# Altium PCB Posedge_LogiX1_MegaWing.PcbDoc
Units mil, origin at the board's own origin, x right, y up, seen from the top; angles counter-clockwise.
Board outline 3350.14 x 2700 mil, 2 copper layers (Top Layer, Bottom Layer); 73 components, 88 nets, 300 pads, 18 vias.
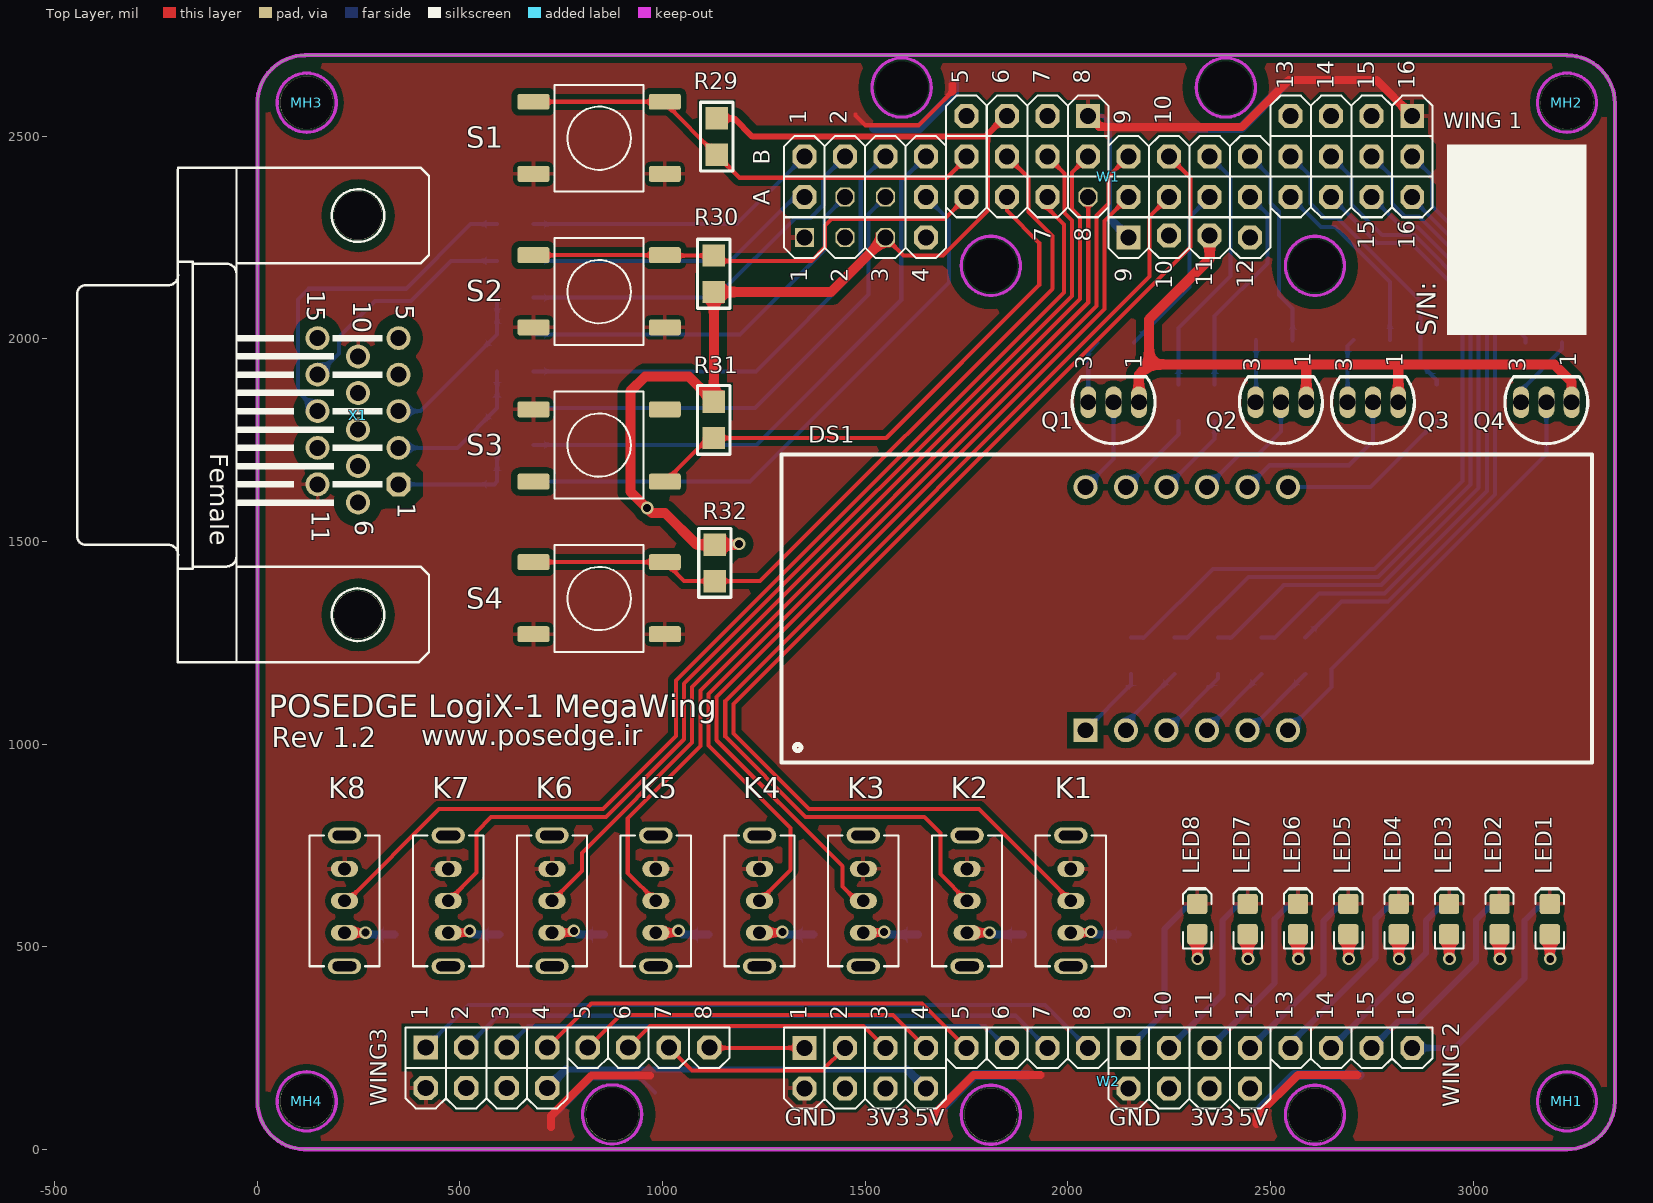
[diagram p0: Top Layer view]
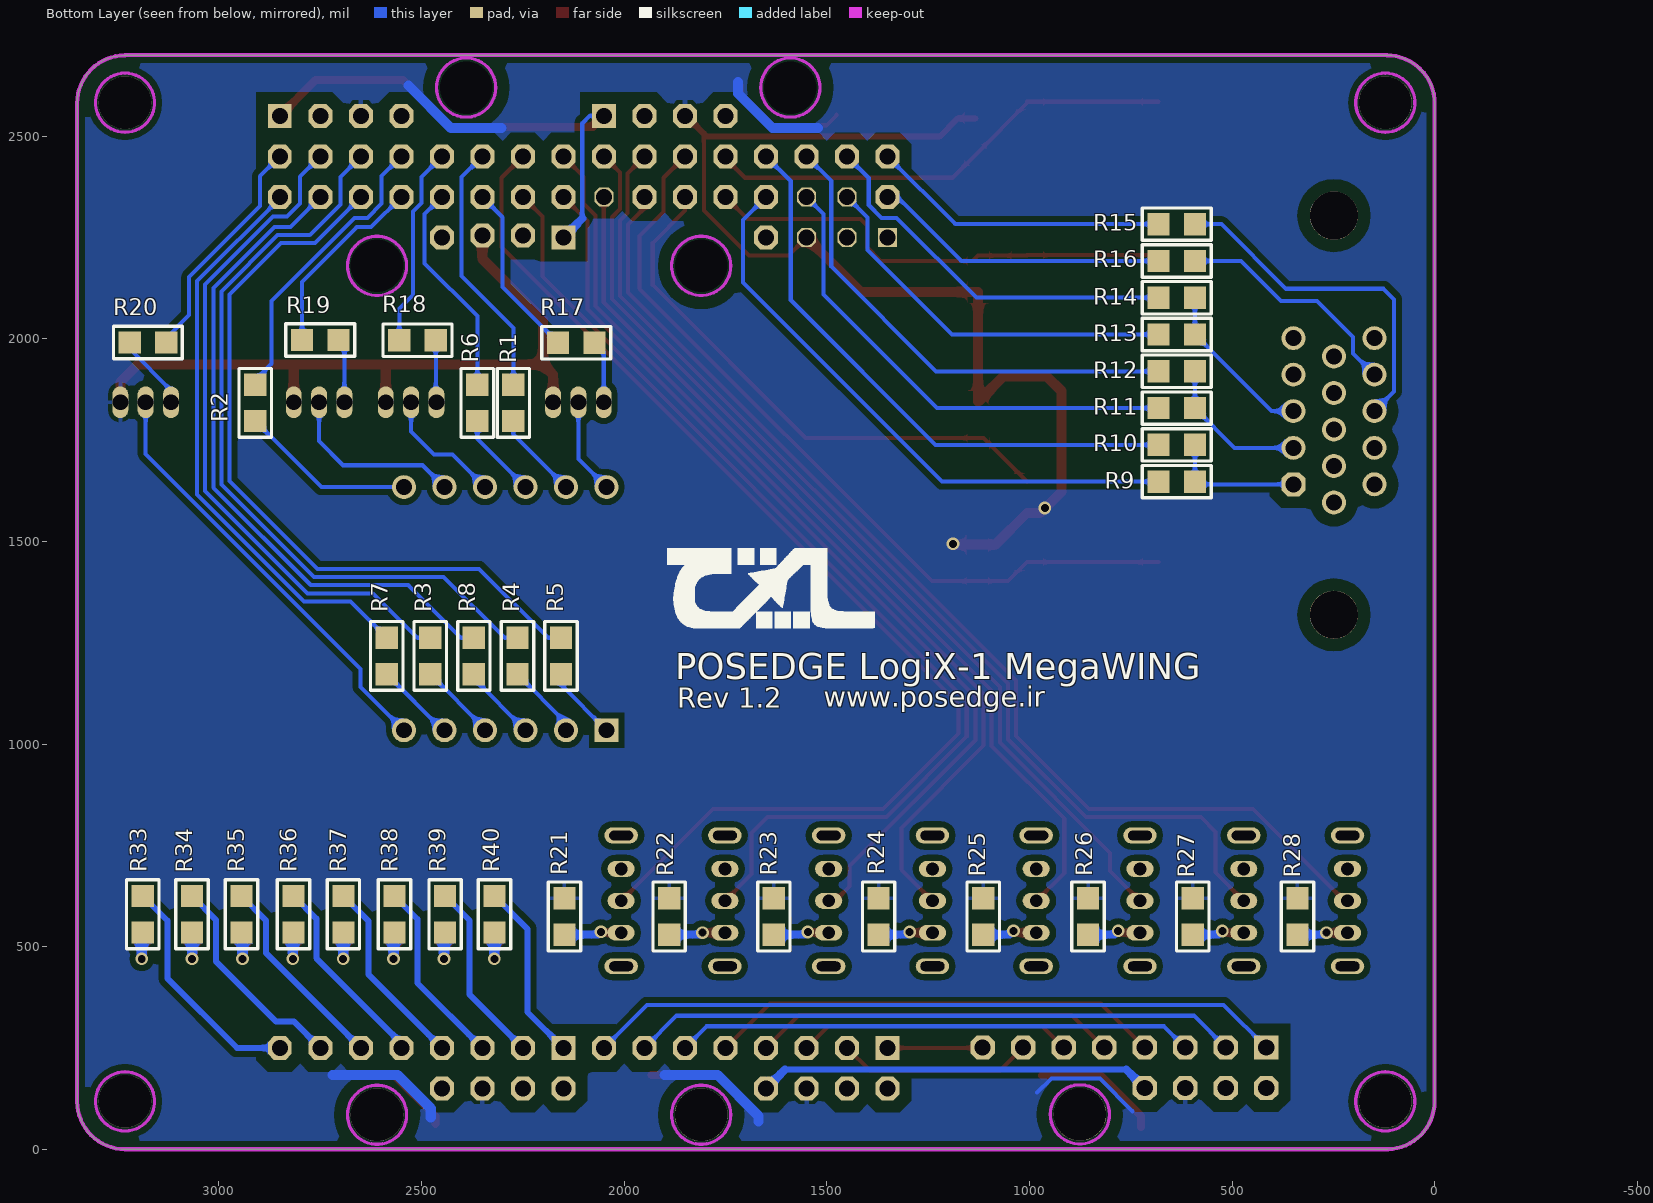
[diagram p1: Bottom Layer view, seen from below]

## Layer stack, top to bottom
Top Solder: solder mask 2, Solder Resist, Dk 3.5
Top Layer: signal copper 1.4
Dielectric 1: dielectric 12.6, FR-4, Dk 4.8
Bottom Layer: signal copper 1.4
Bottom Solder: solder mask 0.4, Solder Resist, Dk 3.5

## Board outline
0,117.5 ccw(c118.11,118.08) 115.17,0 3231.86,0 ccw(c3231.89,118.11) 3350,117.65 3350,2581.5 ccw(c3231.89,2581.54) 3232.35,2699.64 3232.35,2700 118,2700 118,2699.65 ccw(c117.97,2581.54) -0.14,2582 0,2582

## Design rules (kind name [scope] priority, off if disabled: settings)
Clearance Clearance_CH_GND [InNet('CHGND') vs OnLayer('Keep-Out Layer')] p1 off: gap=0
Clearance Clearance_Poly_to_con [InNet('GND','VCC3V3') and InPoly vs InComponent('P*','J*','W*','X*')] p2: gap=30
Clearance Clearance_poly_to_power [InNet('GND','VCC3V3') and InPoly vs (InNet('VCC1V2') OR InNet('VCC3V3') OR InNet('VCC5V0') OR InNet('USB_VCC') OR InNet('VCC5V0_EXT') OR InNet('VCC5V0_USB') OR InNet('VCC5V0_EXT#'))] p3: gap=20
Clearance Clearance_poly_to_all [InNet('GND','VCC3V3') and InPoly] p4: gap=15
Clearance Clearance_poly3_poly5 [InNet('VCC3V3') and InPoly vs InNet('VCC5V0')] p5: gap=15
Clearance Clearance_all_to_all [All] p6: gap=6
DiffPairsRouting [All] p1: maxlimit=10 minlimit=10 mostfreqgap=10 toplayer_minwidth=10 toplayer_maxwidth=15 toplayer_prefwidth=15 bottomlayer_minwidth=10 bottomlayer_maxwidth=15 bottomlayer_prefwidth=15 maxuncoupledlength=500
HoleSize [All] p1: absolutevalues=TRUE maxlimit=150 minlimit=1 maxpercent=80.000 minpercent=20.000
MinimumSolderMaskSliver [All] p1: minsoldermaskwidth=1
PolygonConnect PolygonConnect_via [IsVia] p1: connectstyle=Direct reliefconductorwidth=10 reliefentries=4 polygonreliefangle="90 Angle" airgapwidth=10
PolygonConnect PolygonConnect_GND [InNet('GND')] p2: connectstyle=Relief reliefconductorwidth=10 reliefentries=4 polygonreliefangle="90 Angle" airgapwidth=10
PolygonConnect PolygonConnect_VCC3V3 [InNet('VCC3V3')] p3: connectstyle=Relief reliefconductorwidth=10 reliefentries=4 polygonreliefangle="90 Angle" airgapwidth=10
RoomDefinition wing [InComponentClass('wing')] p1: confinementstyle=ConfineIn formatcopy=TRUE lockcomponents=FALSE outline -3880.5,-2677 -1880.5,-2677 -1880.5,-1677 -3880.5,-1677
RoomDefinition Sheet1 [InComponentClass('Sheet1')] p2: confinementstyle=ConfineIn formatcopy=TRUE lockcomponents=FALSE outline -3880.5,-2677 -1880.5,-2677 -1880.5,-1677 -3880.5,-1677
RoutingCorners RoutingCorners_1 [OnLayer('Top Overlay')] p1: cornerstyle=90-Degree minsetback=100 maxsetback=100
RoutingCorners [All] p2: cornerstyle=45-Degree minsetback=100 maxsetback=100
RoutingVias [All] p1: holewidth=19.68 width=31.5 viastyle="Through Hole" minholewidth=11.81 minwidth=19.68 maxholewidth=31.5 maxwidth=47.24
SilkToBoardRegionClearance [All] p1 off:
SilkToSilkClearance [All] p1: silktosilkclearance=1
SilkToSolderMaskClearance [IsPad] p1: minsilkscreentomaskgap=2 clearancetoexposedcopper=TRUE
SolderMaskExpansion [All] p1: expansion=4
ViasUnderSMD [All] p1: allowed=FALSE
Width [All] p1: maxlimit=75 minlimit=10 preferedwidth=10 minimp=50.000000 maximp=50.000000 favimp=50.000000
23 further rules are at their usual default settings.

## Classes and differential pairs
component class wing: MH1 MH2 MH3 MH4 W1 W2
net class WING1: SEG_A SEG_AN1 SEG_AN2 SEG_AN3 SEG_AN4 SEG_B SEG_C SEG_D SEG_DP SEG_E SEG_F SEG_G SW1 SW2 SW3 SW4 VGA_BLUE0 VGA_BLUE1 VGA_GREEN0 VGA_GREEN1 VGA_HS VGA_RED0 VGA_RED1 VGA_VS W1_A7 W1_A8 W1_A9 W1_A10 W1_B7 W1_B8 W1_B9 W1_B10
net class WING2: LED0 LED1 LED2 LED3 LED4 LED5 LED6 LED7 W2_A1 W2_A2 W2_A3 W2_A4 W2_A5 W2_A6 W2_A7 W2_A8
component class Sheet1: DS1 K1 K2 K3 K4 K5 K6 K7 K8 LED1 LED2 LED3 LED4 LED5 LED6 LED7 LED8 Q1 Q2 Q3 Q4 R1 R2 R3 R4 R5 R6 R7 R8 R9 R10 R11 R12 R13 R14 R15 R16 R17 R18 R19 R20 R21 R22 R23 R24 R25 R26 R27 R28 R29 R30 R31 R32 R33 R34 R35 R36 R37 R38 R39 R40 S1 S2 S3 S4 Wing3 X1

## Components (designator, comment, footprint, x,y, rotation, side; value= is the part's Value field where it differs from the comment)
DS1 "4 digit multiplexed 7_segment display" 7SEG-MPX4-CA 2293.5,1334 r0 top
K1 "ON-ON" SWITCH_SLIDER 2007.5,613 r90 top
K2 "ON-ON" SWITCH_SLIDER 1751.43,613 r90 top
K3 "ON-ON" SWITCH_SLIDER 1495.36,613 r90 top
K4 "ON-ON" SWITCH_SLIDER 1239.29,613 r90 top
K5 "ON-ON" SWITCH_SLIDER 983.21,613 r90 top
K6 "ON-ON" SWITCH_SLIDER 727.14,613 r90 top
K7 "ON-ON" SWITCH_SLIDER 471.07,613 r90 top
K8 "ON-ON" SWITCH_SLIDER 215,613 r90 top
LED1 "" LED_0805 3189.6,568 r90 top
LED2 "" LED_0805 3065.3,568 r90 top
LED3 "" LED_0805 2941,568 r90 top
LED4 "" LED_0805 2816.7,568 r90 top
LED5 "" LED_0805 2692.4,568 r90 top
LED6 "" LED_0805 2568.1,568 r90 top
LED7 "" LED_0805 2443.8,568 r90 top
LED8 "" LED_0805 2319.5,568 r90 top
MH1 "MOUNTING HOLE" MOUNTING_HOLE 3231.89,118.11 r90 top locked
MH2 "MOUNTING HOLE" MOUNTING_HOLE 3231.89,2582.68 r90 top locked
MH3 "MOUNTING HOLE" MOUNTING_HOLE 121.65,2582.68 r90 top
MH4 "MOUNTING HOLE" MOUNTING_HOLE 121.65,118.11 r90 top locked
Q1 "A733" TO-92 2113,1843.5 r90 top
Q2 "A733" TO-92 2526,1843.5 r90 top
Q3 "A733" TO-92 2753,1843.5 r90 top
Q4 "A733" TO-92 3181,1843.5 r90 top
R1 "100R" R0805_M 2273.5,1842 r270 bottom
R2 "100R" R0805_M 2910.5,1842 r270 bottom
R3 "100R" R0805_M 2478.5,1217.5 r270 bottom
R4 "100R" R0805_M 2263.5,1217.5 r270 bottom
R5 "100R" R0805_M 2156,1217.5 r270 bottom
R6 "100R" R0805_M 2362.5,1842 r270 bottom
R7 "100R" R0805_M 2586,1217.5 r270 bottom
R8 "100R" R0805_M 2371,1217.5 r270 bottom
R9 "510R" R0805_M 636.5,1647.5 r0 bottom
R10 "1.2K" R0805_M 636.5,1738.29 r0 bottom
R11 "510R" R0805_M 636.5,1829.07 r0 bottom
R12 "1.2K" R0805_M 636.5,1919.86 r0 bottom
R13 "510R" R0805_M 636.5,2010.64 r0 bottom
R14 "1.2K" R0805_M 636.5,2101.43 r0 bottom
R15 "100R" R0805_M 636.5,2283 r0 bottom
R16 "100R" R0805_M 636.5,2192.21 r0 bottom
R17 "1.2K" R0805_M 2118.5,1990.5 r0 bottom
R18 "1.2K" R0805_M 2510,1996.5 r0 bottom
R19 "1.2K" R0805_M 2750,1997 r0 bottom
R20 "1.2K" R0805_M 3175.5,1991 r180 bottom
R21 "4.7K" R0805_M 2147.5,574.5 r270 bottom
R22 "4.7K" R0805_M 1889.07,574.5 r270 bottom
R23 "4.7K" R0805_M 1630.64,574.5 r270 bottom
R24 "4.7K" R0805_M 1372.21,574.5 r270 bottom
R25 "4.7K" R0805_M 1113.79,574.5 r270 bottom
R26 "4.7K" R0805_M 855.36,574.5 r270 bottom
R27 "4.7K" R0805_M 596.93,574.5 r270 bottom
R28 "4.7K" R0805_M 338.5,574.5 r270 bottom
R29 "4.7K" R0805_M 1133.5,2499 r90 top
R30 "4.7K" R0805_M 1126.5,2160.5 r270 top
R31 "4.7K" R0805_M 1126.5,1800 r90 top
R32 "4.7K" R0805_M 1129,1447 r90 top
R33 "470R" R0805_M 3188,580 r90 bottom
R34 "470R" R0805_M 3066.5,580 r90 bottom
R35 "470R" R0805_M 2944.5,580 r90 bottom
R36 "470R" R0805_M 2816,580 r90 bottom
R37 "470R" R0805_M 2693,580 r90 bottom
R38 "470R" R0805_M 2567,580 r90 bottom
R39 "470R" R0805_M 2442,580 r90 bottom
R40 "470R" R0805_M 2320,580 r90 bottom
S1 "TS645S" TS645S 843.5,2495 r180 top
S2 "TS645S" TS645S 843.5,2116.33 r180 top
S3 "TS645S" TS645S 843.5,1737.67 r0 top
S4 "TS645S" TS645S 843.5,1359 r180 top
W1 "WING32_male" "WING32_HOLES - MALE" 1350,2250 r90 top locked
W2 "WING16_male" "WINGSIDE_16BIT - male" 1350,250 r180 top locked
WING3 "WING8" WINGSIDE_8BIT 1165.5,301 r180 top (schematic designator Wing3)
X1 "DB15-VGA-female" HDF15H 248.5,1812 r270 top

## Footprints (in the part's own frame and the unit in brackets; to place one, negate y for a bottom-side part, rotate by r counter-clockwise, add the part's x,y. Pads: shape width x height; smd on the part's side, far side on the other; paste and mask are expansions set on the pad)
7SEG-MPX4-CA [mm] "4 digit multiplexed 7-Segment Display"
  rect 1.5x1.5 hole 1: 1(-6.35,-7.62)
  round 1.5 hole 1: 2(-3.81,-7.62) 3(-1.27,-7.62) 4(1.27,-7.62) 5(3.81,-7.62) 6(6.35,-7.62) 7(6.35,7.62) 8(3.81,7.62) 9(1.27,7.62) 10(-1.27,7.62) 11(-3.81,7.62) 12(-6.35,7.62)
  silkscreen extent -25.4,-9.65 25.4,9.65, body extent -25.15,-9.5 25.15,9.5, height 7.62
HDF15H [mm]
  round 3.023 hole 3: 1(-12.5,0) 1(12.522,0)
  oct 1.5x1.5 hole 1: 1(4.343,2.54)
  round 1.5 hole 1: 2(2.057,2.54) 3(-0.243,2.54) 4(-2.529,2.54) 5(-4.815,2.54) 6(5.486,0) 7(3.2,0) 8(0.914,0) 9(-1.386,0) 10(-3.672,0) 11(4.343,-2.54) 12(2.057,-2.54) 13(-0.243,-2.54) 14(-2.529,-2.54) 15(-4.815,-2.54)
  silkscreen extent -15.49,-17.61 15.49,4.45, body extent -15.32,-17.66 15.49,3.44, height 12.62
LED_0805 [mil]
  round 20 on Mech15: 0(0,0)
  rrect25% 50x50 smd: 1(37.5,0) 2(-37.5,0)
  Top Layer pour cut-out: -15,30 15,30 15,-30 -15,-30
  silkscreen extent -72,-35 77,35, body extent -39,-25 39,25, height 31
MOUNTING_HOLE [mil] "Papilio Mounting Hole"
  round 130 hole 129.92 unplated: 1(0,0)
  Top Layer keep-out lines w8: -73,0 ccw(c0,0) 73,0 ccw(c0,0) -73,0
  Bottom Layer keep-out lines w8: -73,0 ccw(c0,0) 73,0 ccw(c0,0) -73,0
R0805_M [mil]
  rect 55x55 smd: 1(-45,0) 2(45,0)
  silkscreen extent -85,-40 85,40, body extent -39,-24 39,24, height 20
SWITCH_SLIDER [mm] "TE Connectivity SLS121PC04 SPDT slider"
  oval 1x1.7 hole 0.8: 1(-2,0) 2(0,0) 3(2,0)
  oval 1x2.1 hole 0.6 slot 1.5 at 90 deg: 4(-4.1,0) 5(4.1,0)
  silkscreen extent -4.1,-2.2 4.1,2.2, body extent -5.5,-2.79 5.5,2.79, height 10.01
TO-92 [mm] "TO, Flat Index; 3 In-Line, Axial Leads; Body Dia. 4.8mm; Leads 0.48 x 0.5 mm (max)"
  oval 2x1 hole 1: 1(0,-1.587) 2(0,0) 3(0,1.587)
  silkscreen extent -2.6,-2.6 1.6,2.6, body extent -2.03,-2.51 1.59,2.25, height 4.82
TS645S [mil] "SMT Tactile Switch (6mm x 6mm) - Height 5 mm"
  round 20 on Mech15: 0(0,0)
  rrect25% 78.74x39.37 smd: 1(-162,88) 1(162,88) 2(-162,-90) 2(162,-90)
  silkscreen extent -110,-132 110,132, body extent -177,-118 177,118, height 197
"WING32_HOLES - MALE" [mm]
  round 3.048 hole 3.3: 1(-1.778,-11.684) 1(-1.778,-32.004) 1(9.398,-6.096) 1(9.398,-26.416)
  oct 1.5x1.5 hole 1: A1(2.54,0) A4(2.54,-7.62) A5(2.54,-10.16) A6(2.54,-12.7) A7(2.54,-15.24) A9(2.54,-20.32) A10(2.54,-22.86) A11(2.54,-25.4) A12(2.54,-27.94) A13(2.54,-30.48) A14(2.54,-33.02) A15(2.54,-35.56) A16(2.54,-38.1) B1(5.08,0) B2(5.08,-2.54) B3(5.08,-5.08) B4(5.08,-7.62) B5(5.08,-10.16) B6(5.08,-12.7) B7(5.08,-15.24) B8(5.08,-17.78) B9(5.08,-20.32) B10(5.08,-22.86) B11(5.08,-25.4) B12(5.08,-27.94) B13(5.08,-30.48) B14(5.08,-33.02) B15(5.08,-35.56) B16(5.08,-38.1) P4(0,-7.62) P5(7.62,-10.16) P6(7.62,-12.7) P7(7.62,-15.24) P10(0.127,-22.86) P11(0.127,-25.4) P12(0,-27.94) P13(7.62,-30.48) P14(7.62,-33.02) P15(7.62,-35.56)
  oct 1.2x1.2 hole 1: A2(2.54,-2.54) A3(2.54,-5.08) A8(2.54,-17.78) P2(0,-2.54) P3(0,-5.08)
  rect 1.2x1.2 hole 1: P1(0,0)
  rect 1.5x1.5 hole 1: P8(7.62,-17.78) P9(0,-20.32) P16(7.62,-38.1)
  Top Layer keep-out lines w0.203: 9.398,-4.242 cw(c9.398,-6.096) 9.398,-7.95 cw(c9.398,-6.096) 9.398,-4.242 ; -1.778,-9.83 cw(c-1.778,-11.684) -1.778,-13.538 cw(c-1.778,-11.684) -1.778,-9.83 ; 9.398,-24.562 cw(c9.398,-26.416) 9.398,-28.27 cw(c9.398,-26.416) 9.398,-24.562 ; -1.778,-30.15 cw(c-1.778,-32.004) -1.778,-33.858 cw(c-1.778,-32.004) -1.778,-30.15
  Bottom Layer keep-out lines w0.203: 9.398,-4.242 cw(c9.398,-6.096) 9.398,-7.95 cw(c9.398,-6.096) 9.398,-4.242 ; -1.778,-9.83 cw(c-1.778,-11.684) -1.778,-13.538 cw(c-1.778,-11.684) -1.778,-9.83 ; 9.398,-24.562 cw(c9.398,-26.416) 9.398,-28.27 cw(c9.398,-26.416) 9.398,-24.562 ; -1.778,-30.15 cw(c-1.778,-32.004) -1.778,-33.858 cw(c-1.778,-32.004) -1.778,-30.15
  silkscreen extent -1.27,-39.37 8.89,1.27, body extent -1.14,-39.37 8.89,1.27, height 2.86
WINGSIDE_8BIT [mil]
  round 130 hole 130 unplated: 1(290,215)
  oct 60x60 hole 40: 2V5@2(650,150) 3V3@2(550,150) 5V@2(450,150) A1(650,50) A2(550,50) A3(450,50) A4(350,50) A5(250,50) A6(150,50) A7(50,50) GND@2(750,150)
  rect 60x60 hole 40: A0(750,50)
  Top Layer keep-out lines w8: 363,215 ccw(c290,215) 217,215 ccw(c290,215) 363,215
  Bottom Layer keep-out lines w8: 363,215 ccw(c290,215) 217,215 ccw(c290,215) 363,215
  silkscreen extent 0,0 800,200, body extent 0,0 800,200, height 335
"WINGSIDE_16BIT - male" [mm]
  round 3.302 hole 3.3: 1(-32.004,4.191) 1(-11.684,4.191)
  rect 1.5x1.5 hole 1: A1(0,0) A9(-20.32,0)
  oct 1.5x1.5 hole 1: A2(-2.54,0) A3(-5.08,0) A4(-7.62,0) A5(-10.16,0) A6(-12.7,0) A7(-15.24,0) A8(-17.78,0) A10(-22.86,0) A11(-25.4,0) A12(-27.94,0) A13(-30.48,0) A14(-33.02,0) A15(-35.56,0) A16(-38.1,0) P1(0,2.54) P2(-2.54,2.54) P3(-5.08,2.54) P4(-7.62,2.54) P5(-20.32,2.54) P6(-22.86,2.54) P7(-25.4,2.54) P8(-27.94,2.54)
  Top Layer keep-out lines w0.203: -9.83,4.191 cw(c-11.684,4.191) -13.538,4.191 cw(c-11.684,4.191) -9.83,4.191 ; -30.15,4.191 ccw(c-32.004,4.191) -33.858,4.191 ccw(c-32.004,4.191) -30.15,4.191
  Bottom Layer keep-out lines w0.203: -9.83,4.191 cw(c-11.684,4.191) -13.538,4.191 cw(c-11.684,4.191) -9.83,4.191 ; -30.15,4.191 ccw(c-32.004,4.191) -33.858,4.191 ccw(c-32.004,4.191) -30.15,4.191
  silkscreen extent -39.37,-1.27 1.27,3.81, body extent -39.37,-1.22 1.27,3.76, height 3.11

## Part data
DS1: library part 7SEG-MPX4-CA, "7-Segment 4-Digits"
K1 K2 K3 K4 K5 K6 K7 K8: library part "Slider Switch THD", "Slider Switch THD"
LED1 LED2 LED3 LED4 LED5 LED6 LED7 LED8: library part LED_0805, "LED, 0805 SMD"
MH1 MH2 MH3 MH4: library part MOUNTING_HOLE
Q1 Q2 Q3 Q4: "PNP Bipolar Transistor"
R1 R2 R3 R4 R5 R6 R7 R8 R9 R10 R11 R12 R13 R14 R15 R16 R17 R18 R19 R20 R21 R22 R23 R24 R25 R26 R27 R28 R29 R30 R31 R32 R33 R34 R35 R36 R37 R38 R39 R40: library part R0805, "Chip Resistor size 0805"
S1 S2 S3 S4: library part SW_SMD_4Pin, "SMT Tactile Switch (6mm x 6mm)"
W2: "Papilio Wing16"
X1: library part HF15H, "VGA Connector Right angle"

## Via types
v1: diameter 31.5, hole 19.68, Top Layer to Bottom Layer, tented both sides, 18 vias

## Nets (pads, with @x,y where several pads share a name; then routed paths per layer and width w, separated by ;. In a path a pad name is that pad's centre, name@x,y a point inside that pad or via, vN(x,y) a via of type N, cw(c..) or ccw(c..) an arc to the next point about the centre after c; other vN are vias at no path point)
BLUE: R13.1 R14.1 X1.3 | length 412.1
  Bottom Layer w10: X1.3 402.42,1821.57 R13.1 R14.1
COM1: DS1.12 Q1.2 | length 238.3
  Bottom Layer w10: DS1.12 2113,1703.5 Q1.2
COM2: DS1.9 Q2.2 | length 311.7
  Bottom Layer w10: DS1.9 2424,1714.5 2469.5,1714.5 2526,1771 Q2.2
COM3: DS1.8 Q3.2 | length 464
  Bottom Layer w10: DS1.8@2455,1634 DS1.8 2497.5,1688 2693.5,1688 2753,1747.5 Q3.2
COM4: DS1.6 Q4.2 | length 1073.6
  Bottom Layer w10: DS1.6 2650.5,1141 2650.5,1185 3181,1715.5 Q4.2
GND: K1.3 K2.3 K3.3 K4.3 K5.3 K6.3 K7.3 K8.3 LED1.1 LED2.1 LED3.1 LED4.1 LED5.1 LED6.1 LED7.1 LED8.1 S1.1 S2.1 S3.1 S4.1 W1.P1 W1.P8 W1.P9 W1.P16 W2.P1 W2.P5 WING3.GND@2 X1.10 X1.11 | length 2514.7
  Top Layer w10: 1476,2553.5 1476,2551.5 1500.5,2527 1632,2527 1715.5,2610.5
  Top Layer w20: 725,55 725,82.5 824.5,182 969,182 ; 1668.5,72 1668.5,84.5 1767.5,183.5 1932.5,183.5 ; 1715.5,2610.5 1715.5,2626.5 ; W1.P8 2077.5,2522.5 2429.5,2522.5 2545.5,2638.5 2761.5,2638.5 W1.P16 ; W2.P5@2140,140 W2.P5 ; 2466,63 2466,81.5 2568,183.5 2715,183.5
  Bottom Layer w10: W1.P8 2085.5,2550 2103.5,2532 2103.5,2296.5
  Bottom Layer w20: 2103.5,2296.5 W1.P9
GREEN: R11.1 R12.1 X1.2 | length 374.4
  Bottom Layer w10: X1.2 493.43,1731 R11.1 R12.1
HS: R15.1 X1.13 | length 864.4
  Bottom Layer w10: X1.13 100,1870.07 100,2097.5 126,2123.5 366.97,2123.5 526.47,2283 R15.1
LED0: R33.2 W2.A16 | length 576.8
  Bottom Layer w15: W2.A16 2955.5,250 3127.5,422 3127.5,564.5 R33.2
LED1: R34.2 W2.A15 | length 531.9
  Bottom Layer w15: W2.A15 2815.5,315.5 2859.5,315.5 3007,463 3007,565.5 R34.2
LED2: R35.2 W2.A14 | length 497
  Bottom Layer w15: W2.A14 2884.5,484.5 2884.5,565 R35.2
LED3: R36.2 W2.A13 | length 485.2
  Bottom Layer w15: W2.A13 2550,262 2759.75,471.75 2759.75,568.75 R36.2
LED4: R37.2 W2.A12 | length 475.7
  Bottom Layer w15: W2.A12 2631.5,431.5 2631.5,563.5 R37.2
LED5: R38.2 W2.A11 | length 464.9
  Bottom Layer w15: W2.A11 2510.25,410.25 2510.25,568.25 R38.2
LED6: R39.2 W2.A10 | length 454.5
  Bottom Layer w15: W2.A10 2381.5,381.5 2381.5,564.5 R39.2
LED7: R40.2 W2.A9 | length 445.4
  Bottom Layer w15: W2.A9 2238.75,338.75 2238.75,543.75 R40.2
NetK1_1: K1.1 R21.2 | length 143.8
  Top Layer w20: K1.1 2055.26,534.26 v1(2057.5,536.5)
  Bottom Layer w20: v1(2057.5,536.5) 2064.5,529.5 R21.2
NetK2_1: K2.1 R22.2 | length 139.8
  Top Layer w20: K2.1 1806.76,534.26 v1(1807,534.5)
  Bottom Layer w20: v1(1807,534.5) 1812,529.5 R22.2
NetK3_1: K3.1 R23.2 | length 138.7
  Top Layer w20: K3.1 1545.26,534.26 v1(1547,536)
  Bottom Layer w20: v1(1547,536) 1553.5,529.5 R23.2
NetK4_1: K4.1 R24.2 | length 136.3
  Top Layer w20: K4.1 1293.76,534.26 v1(1295.5,536)
  Bottom Layer w20: v1(1295.5,536) 1302,529.5 R24.2
NetK5_1: K5.1 R25.2 | length 136.5
  Top Layer w20: K5.1 1034.76,534.26 v1(1039.5,539)
  Bottom Layer w20: v1(1039.5,539) 1049,529.5 R25.2
NetK6_1: K6.1 R26.2 | length 134.1
  Top Layer w20: K6.1 776.26,534.26 v1(781,539)
  Bottom Layer w20: v1(781,539) 790.5,529.5 R26.2
NetK7_1: K7.1 R27.2 | length 131.3
  Top Layer w20: K7.1 519.76,534.26 v1(524,538.5)
  Bottom Layer w20: v1(524,538.5) 533,529.5 R27.2
NetK8_1: K8.1 R28.2 | length 125.7
  Top Layer w20: K8.1 266.76,534.26 v1(267,534.5)
  Bottom Layer w20: v1(267,534.5) 272,529.5 R28.2
NetLED1_2: LED1.2 R33.1 | length 125.6
  Top Layer w25: v1@3189.6,471 LED1.2
  Bottom Layer w25: R33.1 3190.6,532.4 v1(3190.6,470)
NetLED2_2: LED2.2 R34.1 | length 124.6
  Top Layer w25: v1@3065.3,471 LED2.2
  Bottom Layer w25: v1(3066.3,470) 3066.3,534.8 R34.1
NetLED3_2: LED3.2 R35.1 | length 125.5
  Top Layer w25: v1@2941,471 LED3.2
  Bottom Layer w25: v1(2942,470) 2942,532.5 R35.1
NetLED4_2: LED4.2 R36.1 | length 125.2
  Top Layer w25: v1@2816.7,471 LED4.2
  Bottom Layer w25: R36.1 2817.7,533.3 v1(2817.7,470)
NetLED5_2: LED5.2 R37.1 | length 124.7
  Top Layer w25: v1@2692.4,471 LED5.2
  Bottom Layer w25: R37.1 2693.4,534.6 v1(2693.4,470)
NetLED6_2: LED6.2 R38.1 | length 125.4
  Top Layer w25: v1@2568.1,471 LED6.2
  Bottom Layer w25: R38.1 2569.1,532.9 v1(2569.1,470)
NetLED7_2: LED7.2 R39.1 | length 125.7
  Top Layer w25: v1@2443.8,471 LED7.2
  Bottom Layer w25: R39.1 2444.8,532.2 v1(2444.8,470)
NetLED8_2: LED8.2 R40.1 | length 126.1
  Top Layer w25: LED8.2 2319.5,471 v1(2320.5,470)
  Bottom Layer w25: R40.1 2320.5,534.5 v1(2320.5,470)
NetQ1_3: Q1.3 R17.1 | length 157
  Bottom Layer w10: Q1.3 2050.5,1968 R17.1@2073.5,1991
NetQ2_3: Q2.3 R18.1 | length 153.6
  Bottom Layer w10: Q2.3 2465,1845 R18.1
NetQ3_3: Q3.3 R19.1 | length 159.5
  Bottom Layer w10: Q3.3 2690.5,1982.5 R19.1
NetQ4_3: Q4.3 R20.1 | length 189.5
  Bottom Layer w10: Q4.3 3118.5,1873 3220,1974.5 R20.1@3220,1991
RED: R9.1 R10.1 X1.1@348.5,1641 | length 336.5
  Bottom Layer w10: X1.1@348.5,1641 585,1641 R9.1 R10.1
SEG_A: R1.1 W1.B11 | length 636.9
  Bottom Layer w10: R1.1 2273.5,2027 2401,2154.5 2401,2399 W1.B11
SEG_AN1: R17.2 W1.A11 | length 436.3
  Bottom Layer w10: R17.2@2163.5,1991 2300,2127.5 2300,2300 W1.A11
SEG_AN2: R18.2 W1.B12 | length 497
  Bottom Layer w10: W1.B12 2500.5,2399.5 2500.5,2335 2521,2314.5 2521,2108.5 2555,2074.5 R18.2
SEG_AN3: R19.2 W1.A13 | length 475.3
  Bottom Layer w10: W1.A13 2624.5,2275.5 2660,2275.5 2795,2140.5 R19.2
SEG_AN4: R20.2 W1.B16 | length 575
  Bottom Layer w10: W1.B16 2898.75,2401.25 2898.75,2327.25 3073.5,2152.5 3073.5,2058.5 3130,2002 R20.2@3130,1991
SEG_B: R2.1 W1.B13 | length 730.9
  Bottom Layer w10: W1.B13 2598.5,2401.5 2598.5,2333.5 2634,2298 2665.78,2298 2870,2093.78 2870,1938.5 2910.5,1898 R2.1
SEG_C: R3.1 W1.B15 | length 1668.6
  Bottom Layer w10: R3.1 2511,1262.5 2620.5,1372 2781.85,1372 3034,1624.15 3034,2133.85 2866.35,2301.5 2832.5,2301.5 2800,2334 2800,2400 W1.B15
SEG_D: R4.1 W1.B14 | length 1885.4
  Bottom Layer w10: R4.1 2296,1262.5 2445.5,1412 2765.28,1412 2994,1640.72 2994,2117.28 2855.28,2256 2776,2256 2700.5,2331.5 2700.5,2399.5 W1.B14
SEG_DP: R8.1 W1.A15 | length 1654.8
  Bottom Layer w10: R8.1 2403.5,1262.5 2533,1392 2773.57,1392 3014,1632.43 3014,2125.57 2863.07,2276.5 2823.5,2276.5 W1.A15 W1.A15@2750,2341.5
SEG_E: R5.1 W1.A14 | length 1861.9
  Bottom Layer w10: R5.1 2188.5,1262.5 2358,1432 2757,1432 2974,1649 2974,2109 2846.5,2236.5 2763.5,2236.5 W1.A14
SEG_F: R6.1 W1.A12 | length 534.5
  Bottom Layer w10: R6.1 2362.5,2056 2492.5,2186 2492.5,2307.5 W1.A12
SEG_G: R7.1 W1.A16 | length 1431.9
  Bottom Layer w10: R7.1 2675.5,1352 2790.14,1352 3054,1615.86 3054,2142.14 W1.A16@2848.07,2348.07
SEGA: DS1.11 R1.2 | length 216.8
  Bottom Layer w10: DS1.11 2273.5,1764 R1.2
SEGB: DS1.7 R2.2 | length 434.5
  Bottom Layer w10: DS1.7 2747.5,1634 R2.2
SEGC: DS1.4 R3.2 | length 194.4
  Bottom Layer w10: DS1.4 2343.5,1037.5 R3.2
SEGD: DS1.2 R4.2 | length 188.2
  Bottom Layer w10: DS1.2 2143.5,1052.5 R4.2
SEGDP: DS1.3 R8.2 | length 191.3
  Bottom Layer w10: DS1.3 2371,1161.5 R8.2
SEGE: DS1.1 R5.2 | length 185.1
  Bottom Layer w10: DS1.1 2156,1146.5 R5.2
SEGF: DS1.10 R6.2 | length 212.3
  Bottom Layer w10: DS1.10 2362.5,1753 R6.2
SEGG: DS1.5 R7.2 | length 199.9
  Bottom Layer w10: DS1.5 2447.5,1034 R7.2
SW1: R29.1 S1.2 W1.B5 | length 1172.3
  Top Layer w10: S1.2@681.5,2585 1005.5,2585 1005.5,2582 R29.1 1190,2397.5 1702,2397.5 1750,2445.5 W1.B5
SW2: R30.1 S2.2 W1.A5 | length 1171.2
  Top Layer w10: S2.2@681.5,2206.33 1005.5,2206.33 1006.33,2205.5 R30.1 1140,2192 1367,2192 1401,2226 1401,2279.5 1417,2295.5 1695.5,2295.5 W1.A5
SW3: R31.1 S3.2 W1.A6 | length 1375.3
  Top Layer w10: S3.2@1005.5,1647.67 1112.83,1755 R31.1 1552,1755 1929.5,2132.5 1929.5,2237 1850,2316.5 W1.A6
SW4: R32.1 S4.2 W1.B6 | length 1971.7
  Top Layer w10: S4.2@681.5,1449 1005.5,1449 1052.5,1402 R32.1 1240.5,1402 1962,2123.5 1962,2253.5 1902.5,2313 1902.5,2397.5 W1.B6
VCC3V3: Q1.1 Q2.1 Q3.1 Q4.1 R21.1 R22.1 R23.1 R24.1 R25.1 R26.1 R27.1 R28.1 R29.2 R30.2 R31.2 R32.2 W1.P3 W1.P6 W1.P11 W1.P14 W2.P3 W2.P7 WING3.3V3@2 | length 6011.1
  Top Layer w10: W1.P3 1594.5,2205.5 1692,2205.5 1803.5,2317 1803.5,2506
  Top Layer w15: R29.2 1176.5,2544 1221.5,2499 1796.5,2499 1803.5,2506 1847.5,2550 W1.P6
  Top Layer w25: v1(1188.5,1494) 1186.5,1492 R32.2 1084,1492 1006,1570 973.5,1570 920.5,1623 920.5,1870.5 957,1907 1064.5,1907 R31.2 R30.2 1415.5,2115.5 W1.P3 ; Q1.1 2175.5,1911.5 2200.5,1936.5 ; W1.P11@2350,2250 2350,2197.5 2200.5,2048 2200.5,1936.5 ; Q2.1 2588.5,1935.5 2587.5,1936.5 ; Q3.1 2815.5,1933 2819,1936.5 ; Q4.1 3243.5,1893.5 3200.5,1936.5 2819,1936.5 ; 2200.5,1936.5 2587.5,1936.5 ; 2587.5,1936.5 2819,1936.5
  Bottom Layer w10: 745.25,93.75 826.26,174.76 945.74,174.76 981,139.5
  Bottom Layer w25: 1522.5,2520.5 1634,2520.5 1719,2605.5 1719,2633.5 ; 1669,68.5 1669,82.5 1770,183.5 1901,183.5 ; 2303,2520 2427.5,2520 2532.5,2625 ; 2477.5,78.5 2477.5,101 2560,183.5 2719.5,183.5
  other v1: 962,1582.5
VCC5V: W2.P4 WING3.5V@2 | length 972.6
  Bottom Layer w15: 761,196.5 1603.5,196.5
  Bottom Layer w20: 715.5,151 761,196.5 ; 1603.5,196.5 W2.P4
VGA_BLUE0: R13.2 W1.A2 | length 956.2
  Bottom Layer w10: R13.2 1191.14,2010.64 1399.5,2219 1399.5,2299.5 W1.A2
VGA_BLUE1: R14.2 W1.B2 | length 951.8
  Bottom Layer w10: R14.2 1130.43,2101.43 1327.5,2298.5 1365,2298.5 1396.5,2330 1396.5,2396.5 W1.B2
VGA_GREEN0: R11.2 W1.A3 | length 1200.8
  Bottom Layer w10: R11.2 1228.07,1829.07 1508.5,2109.5 1508.5,2308.5 W1.A3
VGA_GREEN1: R12.2 W1.B3 | length 1211.4
  Bottom Layer w10: R12.2 1230.36,1919.86 1489,2178.5 1489,2389 W1.B3
VGA_HS: R15.2 W1.B1 | length 737.7
  Bottom Layer w10: R15.2 1183,2283 W1.B1
VGA_RED0: R9.2 W1.A4 | length 1463.3
  Bottom Layer w10: R9.2 1215.5,1647.5 1706.5,2138.5 1706.5,2293.5 W1.A4
VGA_RED1: R10.2 W1.B4 | length 1435.2
  Bottom Layer w10: R10.2 1231.79,1738.29 1589,2095.5 1589,2389 W1.B4
VGA_VS: R16.2 W1.A1 | length 733.9
  Bottom Layer w10: R16.2 1168.21,2192.21 1326,2350 W1.A1
VS: R16.1 X1.14 | length 582.6
  Bottom Layer w10: X1.14 201,1964.07 201,2004 290.5,2093.5 379.39,2093.5 478.11,2192.21 R16.1
W1_A7: K8.2 W1.A7 | length 2727.9
  Top Layer w10: K8.2@218.5,609.5 448.5,839.5 852.5,839.5 1033.08,1020.08 1033.08,1157.08 1990.5,2114.5 1990.5,2282 1950,2322.5 W1.A7
W1_A8: K5.2 W1.A8 | length 2236.4
  Top Layer w10: K5.2 914,682.21 914,816.15 1093.08,995.23 1093.08,1132.23 2050.5,2089.65 W1.A8@2050.5,2350
W1_A9: K3.2 W1.A9 | length 2317.6
  Top Layer w10: K3.2 1479.5,613 1444,648.5 1444,698.42 1133.08,1009.34 1133.08,1115.66 2090.5,2073.08 2090.5,2290.5 W1.A9
W1_A10: K2.2 W1.A10 | length 2609.5
  Top Layer w10: K2.2 1685.5,678.93 1685.5,780.5 1645.8,820.2 1352.8,820.2 1154.7,1018.3 1154.7,1106.7 2202,2154 2202,2302 W1.A10
W1_B7: K7.2 W1.B7 | length 2665.9
  Top Layer w10: K7.2 540.5,682.43 540.5,783 577,819.5 860.78,819.5 1053.08,1011.79 1053.08,1148.79 2010.5,2106.22 2010.5,2292 1991.5,2311 1991.5,2408.5 W1.B7
W1_B8: K6.2 W1.B8 | length 2401.5
  Top Layer w10: K6.2 801,686.86 801,731.43 1073.08,1003.51 1073.08,1140.51 2030.5,2097.93 2030.5,2300 2010.5,2320 2010.5,2410.5 W1.B8
W1_B9: K4.2 W1.B9 | length 2382.3
  Top Layer w10: K4.2 1316,689.71 1316,793 1113.08,995.92 1113.08,1123.94 2070.5,2081.36 2070.5,2304 2100,2333.5 2100,2400 W1.B9
W1_B10: K1.2 W1.B10 | length 2916.8
  Top Layer w10: K1.2 1780.5,840 1361,840 1174.5,1026.5 1174.5,1098.5 2302.5,2226.5 2302.5,2397.5 W1.B10
W2_A1: W2.A1 WING3.A7 | length 234.9
  Top Layer w10: WING3.A7@1116.5,250 W2.A1
  Top Layer w15: WING3.A7 WING3.A7@1116.5,250
W2_A2: W2.A2 WING3.A6 | length 481.3
  Top Layer w10: WING3.A6 1072.5,194 1394,194 W2.A2
W2_A3: W2.A3 WING3.A5 | length 693
  Top Layer w10: WING3.A5 969,304.5 1495.5,304.5 W2.A3 W2.A3@1559.75,259.75
W2_A4: W2.A4 WING3.A4 | length 901.6
  Top Layer w10: WING3.A4 896,331.5 1568.5,331.5 W2.A4
W2_A5: W2.A5 WING3.A3 | length 1124.8
  Top Layer w10: WING3.A3 824,359.5 1640.5,359.5 W2.A5
W2_A6: W2.A6 WING3.A2 | length 1278.4
  Bottom Layer w10: WING3.A2 668,303.5 1796.5,303.5 W2.A6
W2_A7: W2.A7 WING3.A1 | length 1499.9
  Bottom Layer w10: WING3.A1 594,329.5 1870.5,329.5 W2.A7
W2_A8: W2.A8 WING3.A0 | length 1722.3
  Bottom Layer w10: WING3.A0 521,356.5 1943.5,356.5 W2.A8
pads on no net: K1.4 K1.5 K2.4 K2.5 K3.4 K3.5 K4.4 K4.5 K5.4 K5.5 K6.4 K6.5 K7.4 K7.5 K8.4 K8.5 LED1.0 LED2.0 LED3.0 LED4.0 LED5.0 LED6.0 LED7.0 LED8.0 MH1.1 MH2.1 MH3.1 MH4.1 S1.0 S2.0 S3.0 S4.0 W1.1 W1.P2 W1.P4 W1.P5 W1.P7 W1.P10 W1.P12 W1.P13 W1.P15 W2.1 W2.P2 W2.P6 W2.P8 WING3.1 WING3.2V5@2 X1.1@248.5,1319 X1.1@248.5,2304.13 X1.4 X1.5 X1.6 X1.7 X1.8 X1.9 X1.12 X1.15

## Polygon pours and split planes (outlines as drawn)
GND on Top Layer "Bottom Layer-No Net 1" (solid, pour order 4): 0,2700 0,0 3350.5,0 3350.5,2700
VCC3V3 on Bottom Layer "Bottom Layer-No Net 1" (solid, remove dead copper, pour order 3): 0,2700 0,0 3350.5,0 3350.5,2700

## Keep-outs
Keep-Out Layer:
  lines w10: -0.14,2582 cw(c117.97,2581.54) 118,2699.65 ; 0,2582 0,117.5 ccw(c118.11,118.08) 115.17,0 3231.86,0 ccw(c3231.89,118.11) 3350,117.65 3350,2581.5 ccw(c3231.89,2581.54) 3232.35,2699.64 ; 118,2700 3232.35,2700

## Silkscreen, mask and mechanical layers (free items; w line width, h text height)
Top Overlay:
  rectangle: 2936,2009 3280,2479.5
  text "5" at 1768.5,2630 h70 r90
  text "6" at 1868.5,2630 h70 r90
  text "7" at 1968.5,2630 h70 r90
  text "8" at 2068.5,2630 h70 r90
  text "13" at 2570,2616 h70 r90
  text "14" at 2670,2616 h70 r90
  text "15" at 2770,2616 h70 r90
  text "16" at 2870,2616 h70 r90
  text "1" at 1368.5,2530 h70 r90
  text "2" at 1468.5,2530 h70 r90
  text "9" at 2168.5,2530 h70 r90
  text "10" at 2268.5,2530 h70 r90
  text "WING 1" at 2927,2505.5 h65
  text "B" at 1278.5,2430 h70 r90
  text "A" at 1278.5,2330 h70 r90
  text "7" at 1971,2239 h70 r90
  text "8" at 2071,2239 h70 r90
  text "15" at 2770,2221.5 h70 r90
  text "16" at 2870,2221.5 h70 r90
  text "1" at 1371,2139 h70 r90
  text "2" at 1471,2139 h70 r90
  text "3" at 1571,2139 h70 r90
  text "4" at 1671,2139 h70 r90
  text "9" at 2171,2139 h70 r90
  text "11" at 2370.5,2128 h70 r90
  text "12" at 2471.5,2124.5 h70 r90
  text "10" at 2271.5,2122.5 h70 r90
  text "S/N:" at 2924,2007.5 h80 r90
  text "POSEDGE LogiX-1 MegaWing" at 27.5,1048 h95
  text "www.posedge.ir" at 404,980 h85
  text "Rev 1.2" at 35.5,974.5 h85
  text "1" at 434.5,320 h70 r90
  text "2" at 534.5,320 h70 r90
  text "3" at 634.5,320 h70 r90
  text "4" at 734.5,320 h70 r90
  text "5" at 834.5,320 h70 r90
  text "6" at 934.5,320 h70 r90
  text "7" at 1034.5,320 h70 r90
  text "8" at 1134.5,320 h70 r90
  text "1" at 1369,319 h70 r90
  text "2" at 1469,319 h70 r90
  text "3" at 1569,319 h70 r90
  text "4" at 1669,319 h70 r90
  text "5" at 1769,319 h70 r90
  text "6" at 1869,319 h70 r90
  text "7" at 1969,319 h70 r90
  text "8" at 2069,319 h70 r90
  text "9" at 2169,319 h70 r90
  text "10" at 2269,319 h70 r90
  text "11" at 2369,319 h70 r90
  text "12" at 2469,319 h70 r90
  text "13" at 2569,319 h70 r90
  text "14" at 2669,319 h70 r90
  text "15" at 2769,319 h70 r90
  text "16" at 2869,319 h70 r90
  text "WING 2" at 2979.5,103.5 h70 r90
Bottom Overlay:
  drawing of 739 lines, arcs and shapes, not listed
  text "POSEDGE LogiX-1 MegaWING" at 1874,1139.5 h110
  text "www.posedge.ir" at 1508,1075 h85
  text "Rev 1.2" at 1868.5,1072 h85

## Dimensions
3231.86,0 to 118,2700 on Mechanical 1
0,117.5 to 3350,117.65 on Mechanical 1

## Text inside footprints (layer, text, board x,y; h text height)
Q1: Top Overlay "3" at 2074.5,1923.5 h70 r90; Top Overlay "1" at 2196,1926.5 h70 r90
Q2: Top Overlay "3" at 2488.5,1918.5 h70 r90; Top Overlay "1" at 2613.5,1931 h70 r90
Q3: Top Overlay "3" at 2715.5,1918.5 h70 r90; Top Overlay "1" at 2840.5,1931 h70 r90
Q4: Top Overlay "3" at 3143.5,1918.5 h70 r90; Top Overlay "1" at 3268.5,1931 h70 r90
W2: Top Overlay "5V" at 2422,45 h70; Top Overlay "3V3" at 2302,45 h70; Top Overlay "GND" at 2102,45 h70; Top Overlay "5V" at 1622,45 h70; Top Overlay "3V3" at 1502,45 h70; Top Overlay "GND" at 1302,45 h70
X1: Top Overlay "1" at 331.5,1596 h77.5 r270; Top Overlay "5" at 327.5,2084.24 h77.5 r270; Top Overlay "6" at 226.26,1552 h77.5 r270; Top Overlay "10" at 222.32,2092.12 h77.5 r270; Top Overlay "15" at 108.15,2119.87 h77.5 r270; Top Overlay "11" at 119.96,1576 h77.5 r270; Top Overlay "Female" at -131.5,1717 h77.5 r270; Mechanical 2 ">NAME" at 448.5,2162 h108.5 r270; Mechanical 4 ">VALUE" at 448.5,1812 h108.5 r270; Mechanical 16 "HDF15 CONEC" at -330.91,2050.74 h77.5 r270